# EAGLE board relaycard (EAGLE 6.2)
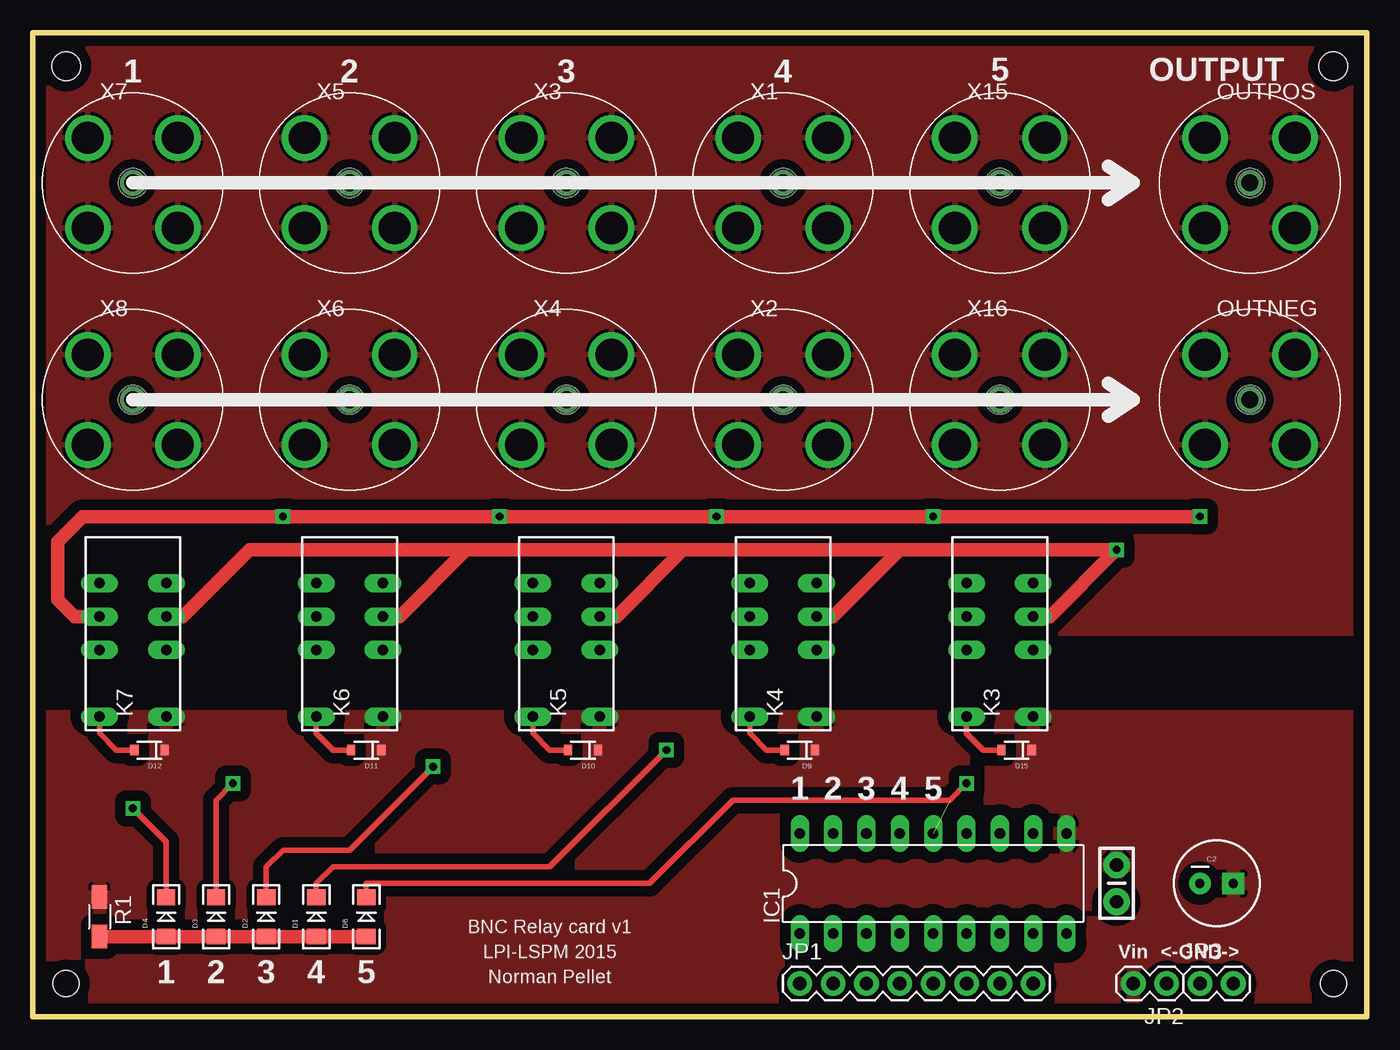
[diagram p0: board, top side]
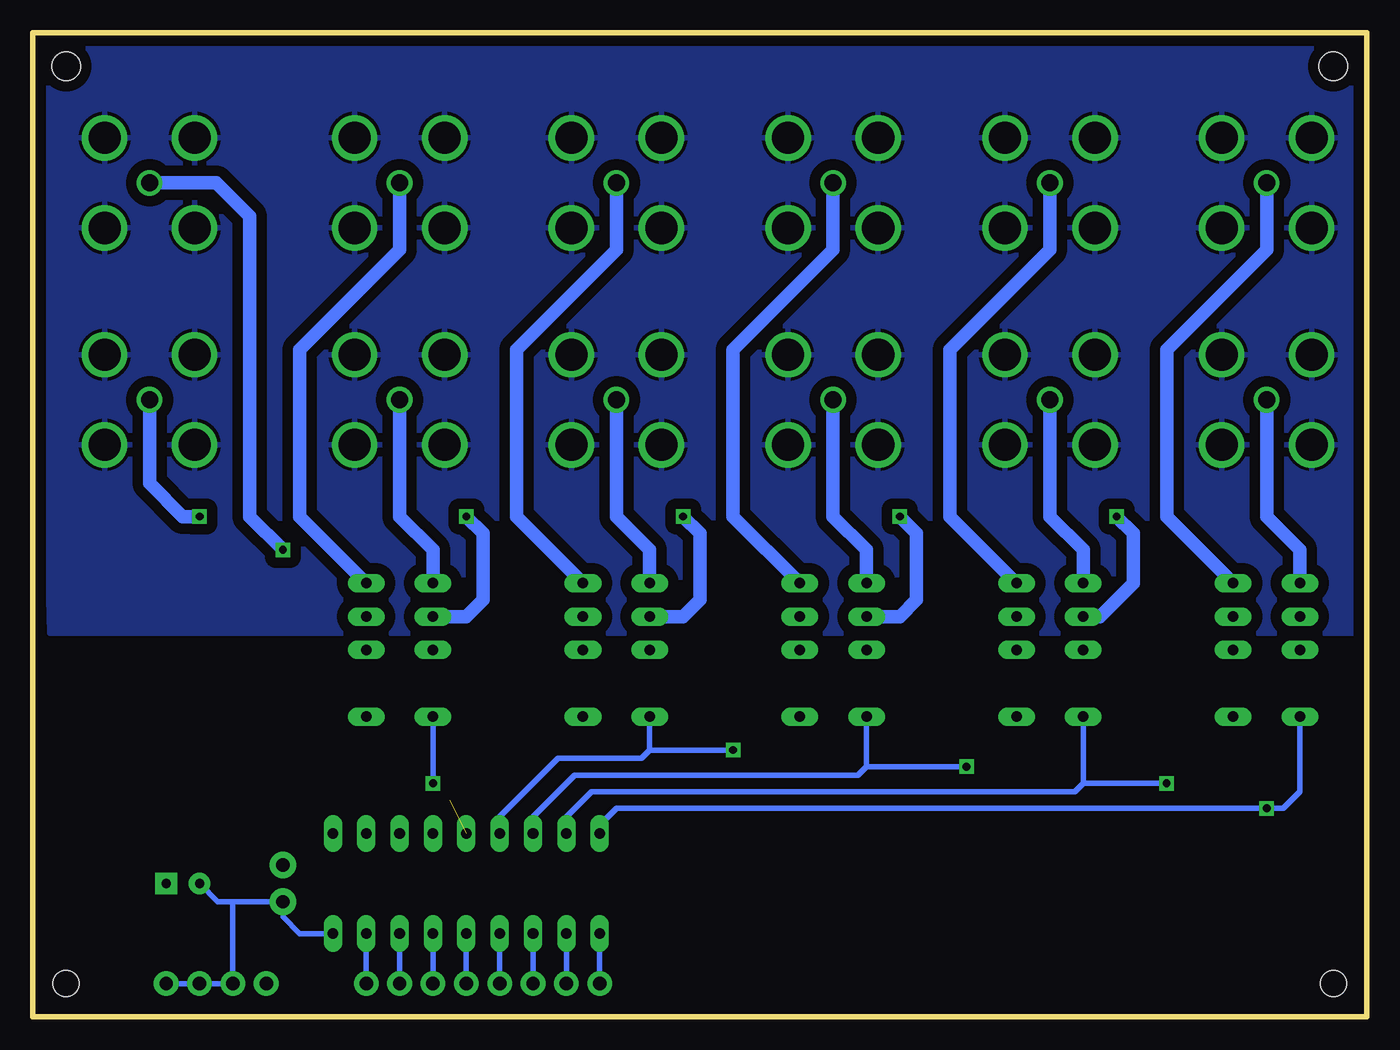
[diagram p1: board, bottom side, seen from below]

Size 101.6 x 74.93 mm. Coordinates in mm from the lower left corner, seen from the top.
Outline: 0,0 101.6,0 101.6,74.93 0,74.93 0,0
Copper layers (1*16): Top 0.035mm / dielectric 1.5mm / Bottom 0.035mm
Design rules: minimum track width 8mil, minimum drill 20mil, track to track 8mil, track to pad 8mil, pad to pad 8mil, via to via 8mil, smd to smd 8mil, copper to edge 10mil, drill to drill 8mil, minimum pad ring 12mil, minimum via ring 10mil, stop-mask expansion 4mil, vias tented up to drill 25mil, thermal gap 10mil
Holes 2.2 mm at 2.54,72.39 99.06,72.39
Holes 2 mm at 99.06,2.54 2.54,2.54

## Footprints (pad centres in the part's own frame; a part is rotated, then mirrored left to right if it is on the bottom)
CAP-PTH-SMALL-KIT = drill 1.016 pad 2.032: 1 -1.397,0; 2 1.397,0
CPOL-RADIAL-100UF-25V = drill 0.7 pad 1.651 square: 1 1.27,0 | drill 0.7 pad 1.651: 2 -1.27,0
LED-1206 = smd 1.2 x 1.4: A -1.5,0; C 1.5,0
SOD-323 = smd 0.63 x 0.83: A 1.15,0; C -1.15,0
DIL18 = drill 0.813 long: 1 -10.16,-3.81; 2 -7.62,-3.81; 3 -5.08,-3.81; 4 -2.54,-3.81; 5 0,-3.81; 6 2.54,-3.81; 7 5.08,-3.81; 8 7.62,-3.81; 9 10.16,-3.81; 10 10.16,3.81; 11 7.62,3.81; 12 5.08,3.81; 13 2.54,3.81; 14 0,3.81; 15 -2.54,3.81; 16 -5.08,3.81; 17 -7.62,3.81; 18 -10.16,3.81
1X08_ROUND = drill 1.016 pad 1.88: 1 0,0; 2 2.54,0; 3 5.08,0; 4 7.62,0; 5 10.16,0; 6 12.7,0; 7 15.24,0; 8 17.78,0
1X02 = drill 1.016 pad 1.88: 1 0,0; 2 2.54,0
NA = drill 0.8 long: 1 -6.35,-2.54; 3 -1.27,-2.54; 4 1.27,-2.54; 5 3.81,-2.54; 8 3.81,2.54; 9 1.27,2.54; 10 -1.27,2.54; 12 -6.35,2.54
112404 = drill 1.3: 1 0,0 | drill 2.44: 2 -3.43,3.43; 3 3.43,3.43; 4 3.43,-3.43; 5 -3.43,-3.43
R1206W = smd 1.8 x 1.2: 1 -1.499,0; 2 1.499,0

## Placement (x,y rotation side)
C1  [CAP-PTH-SMALL-KIT]  82.55,10.16 90 top
C2  [CPOL-RADIAL-100UF-25V]  90.17,10.16 0 top
D1  RED  [LED-1206]  21.59,7.62 90 top
D2  RED  [LED-1206]  17.78,7.62 90 top
D3  RED  [LED-1206]  13.97,7.62 90 top
D4  RED  [LED-1206]  10.16,7.62 90 top
D8  RED  [LED-1206]  25.4,7.62 90 top
D9  250mA/100V  [SOD-323]  58.42,20.32 180 top
D10  250mA/100V  [SOD-323]  41.91,20.32 180 top
D11  250mA/100V  [SOD-323]  25.4,20.32 180 top
D12  250mA/100V  [SOD-323]  8.89,20.32 180 top
D15  250mA/100V  [SOD-323]  74.93,20.32 180 top
IC1  ULN2801A  [DIL18]  68.58,10.16 0 top
JP1  [1X08_ROUND]  58.42,2.54 0 top
JP2  [1X02]  86.36,2.54 180 top
JP3  [1X02]  88.9,2.54 0 top
K3  NA  [NA]  73.66,29.21 90 top
K4  NA  [NA]  57.15,29.21 90 top
K5  NA  [NA]  40.64,29.21 90 top
K6  NA  [NA]  24.13,29.21 90 top
K7  NA  [NA]  7.62,29.21 90 top
OUTNEG  112404  [112404]  92.71,46.99 0 top
OUTPOS  112404  [112404]  92.71,63.5 0 top
R1  [R1206W]  5.08,7.62 270 top
X1  112404  [112404]  57.15,63.5 0 top
X2  112404  [112404]  57.15,46.99 0 top
X3  112404  [112404]  40.64,63.5 0 top
X4  112404  [112404]  40.64,46.99 0 top
X5  112404  [112404]  24.13,63.5 0 top
X6  112404  [112404]  24.13,46.99 0 top
X7  112404  [112404]  7.62,63.5 0 top
X8  112404  [112404]  7.62,46.99 0 top
X15  112404  [112404]  73.66,63.5 0 top
X16  112404  [112404]  73.66,46.99 0 top

## Library data of the parts
C1 = SparkFun-Capacitors; PROD_ID: CAP-08370
C2 = SparkFun-Capacitors; PROD_ID: CAP-08439
D1-D4 D8 = SparkFun-LED; PROD_ID: DIO-09912
D9-D12 D15 = SparkFun-DiscreteSemi; PROD_ID: DIO-09646
IC1 = uln-udn
JP1-JP3 = SparkFun-Connectors
K3-K7 = relay; OC_FARNELL: unknown; OC_NEWARK: unknown
OUTNEG OUTPOS X1-X8 X15 X16 = amphenol-112404_10; MF: Amphenol Connex; MPN: 112404; OC_FARNELL: 1583381; OC_NEWARK: 99H4363
R1 = resistor

## Nets
GND: OUTNEG.2 OUTNEG.3 OUTNEG.4 OUTNEG.5 OUTPOS.2 OUTPOS.3 OUTPOS.4 OUTPOS.5 X1.2 X1.3 X1.4 X1.5 X2.2 X2.3 X2.4 X2.5 X3.2 X3.3 X3.4 X3.5 X4.2 X4.3 X4.4 X4.5 X5.2 X5.3 X5.4 X5.5 X6.2 X6.3 X6.4 X6.5 X7.2 X7.3 X7.4 X7.5 X8.2 X8.3 X8.4 X8.5 X15.2 X15.3 X15.4 X15.5 X16.2 X16.3 X16.4 X16.5
GND2: C1.1 C2.2 IC1.9 JP2.1 JP3.1 JP3.2
N$1: K4.5 X1.1
N$2: IC1.1 JP1.1
N$3: K4.8 X2.1
N$4: K5.5 X3.1
N$5: K5.8 X4.1
N$6: IC1.2 JP1.2
N$7: K6.5 X5.1
N$8: IC1.3 JP1.3
N$9: IC1.4 JP1.4
N$10: IC1.5 JP1.5
N$11: IC1.6 JP1.6
N$12: IC1.7 JP1.7
N$14: K6.8 X6.1
N$18: IC1.8 JP1.8
N$21: K7.5 X7.1
N$23: K7.8 X8.1
N$24: K3.5 X15.1
N$25: K3.8 X16.1
OUTNEG: K3.9 K4.9 K5.9 K6.9 K7.9 OUTNEG.1
OUTPOS: K3.4 K4.4 K5.4 K6.4 K7.4 OUTPOS.1
RELAY1: D4.C D12.A IC1.18 K7.12
RELAY2: D3.C D11.A IC1.17 K6.12
RELAY3: D2.C D10.A IC1.16 K5.12
RELAY4: D1.C D9.A IC1.15 K4.12
RELAY5: D8.C D15.A IC1.14 K3.12
RELAY6: IC1.13
RELAY7: IC1.12
RELAY8: IC1.11
RES: D1.A D2.A D3.A D4.A D8.A R1.2
VCC: C1.2 C2.1 D9.C D10.C D11.C D12.C D15.C IC1.10 JP2.2 K3.1 K4.1 K5.1 K6.1 K7.1 R1.1

## Tracks (layer width: path | path; a pad name or v marks a point on that pad's centre or on a via)
GND
  pour Bottom (isolate 0.813): 0,74.93 0,29.21 100.33,29.21 101.6,74.93
  pour Top (isolate 0.813): 0,74.93 0,29.21 101.6,29.21 101.6,74.93
GND2
  Bottom 0.406: IC1.9 81.28,6.35 82.55,7.62 C1.1 86.36,8.76 | 86.36,8.76 87.5,8.76 C2.2 | 86.36,8.76 JP2.1 JP3.1 JP3.2
N$1
  Bottom 1.016: X1.1 57.15,58.42 64.77,50.8 64.77,38.1 K4.5
N$2
  Bottom 0.406: IC1.1 JP1.1
N$3
  Bottom 1.016: X2.1 57.15,38.1 54.61,35.56 K4.8
N$4
  Bottom 1.016: X3.1 40.64,58.42 48.26,50.8 48.26,38.1 K5.5
N$5
  Bottom 1.016: X4.1 40.64,38.1 38.1,35.56 K5.8
N$6
  Bottom 0.406: JP1.2 IC1.2
N$7
  Bottom 1.016: X5.1 24.13,58.42 31.75,50.8 31.75,38.1 K6.5
N$8
  Bottom 0.406: JP1.3 IC1.3
N$9
  Bottom 0.406: JP1.4 IC1.4
N$10
  Bottom 0.406: JP1.5 IC1.5
N$11
  Bottom 0.406: JP1.6 IC1.6
N$12
  Bottom 0.406: JP1.7 IC1.7
N$14
  Bottom 1.016: X6.1 24.13,38.1 21.59,35.56 K6.8
N$18
  Bottom 0.406: JP1.8 IC1.8
N$21
  Bottom 1.016: X7.1 7.62,58.42 15.24,50.8 15.24,38.1 K7.5
N$23
  Bottom 1.016: X8.1 7.62,38.1 5.08,35.56 K7.8
N$24
  Bottom 1.016: X15.1 73.66,58.42 81.28,50.8 81.28,38.1 K3.5
N$25
  Bottom 1.016: X16.1 73.66,38.1 71.12,35.56 K3.8
OUTNEG  (via drill 0.6)
  Top 1.016: v88.9,38.1 v68.58,38.1 v52.07,38.1 v35.56,38.1 v19.05,38.1 3.81,38.1 1.91,36.2 1.91,31.75 3.17,30.48 K7.9
  Bottom 1.016: v88.9,38.1 90.17,38.1 92.71,40.64 OUTNEG.1 | K6.9 20.32,30.48 17.78,33.02 17.78,36.83 v19.05,38.1 | K5.9 35.56,30.48 34.29,31.75 34.29,36.83 v35.56,38.1 | K4.9 52.07,30.48 50.8,31.75 50.8,36.83 v52.07,38.1 | K3.9 68.58,30.48 67.31,31.75 67.31,36.83 v68.58,38.1
OUTPOS  (via drill 0.6)
  Top 1.016: 33.02,35.56 16.51,35.56 11.43,30.48 K7.4 | 33.02,35.56 49.53,35.56 | 49.53,35.56 66.04,35.56 | 66.04,35.56 v82.55,35.56 77.47,30.48 K3.4 | K4.4 60.96,30.48 66.04,35.56 | K5.4 44.45,30.48 49.53,35.56 | K6.4 27.94,30.48 33.02,35.56
  Bottom 1.016: v82.55,35.56 85.09,38.1 85.09,60.96 87.63,63.5 OUTPOS.1
RELAY1  (via drill 0.6)
  Top 0.406: D12.A 6.35,20.32 5.08,21.59 K7.12 | D4.C 10.16,13.34 v7.62,15.88
  Bottom 0.406: K7.12 5.08,17.14 6.35,15.88 v7.62,15.88 57.15,15.88 58.42,14.61 IC1.18
RELAY2  (via drill 0.6)
  Top 0.406: D11.A 22.86,20.32 21.59,21.59 K6.12 | D3.C 13.97,16.51 v15.24,17.78
  Bottom 0.406: K6.12 21.59,17.78 | 21.59,17.78 22.23,17.14 59.05,17.14 60.96,15.24 IC1.17 | v15.24,17.78 21.59,17.78
RELAY3  (via drill 0.6)
  Top 0.406: D10.A 39.37,20.32 38.1,21.59 K5.12 | D2.C 17.78,11.43 19.05,12.7 24.13,12.7 v30.48,19.05
  Bottom 0.406: K5.12 38.1,19.05 | 38.1,19.05 38.73,18.41 60.33,18.41 63.5,15.24 IC1.16 | v30.48,19.05 38.1,19.05
RELAY4  (via drill 0.6)
  Top 0.406: D9.A 55.88,20.32 54.61,21.59 K4.12 | D1.C 21.59,10.16 22.86,11.43 39.37,11.43 v48.26,20.32
  Bottom 0.406: K4.12 54.61,20.32 | 54.61,20.32 55.24,19.68 61.59,19.68 66.04,15.24 IC1.15 | v48.26,20.32 54.61,20.32
RELAY5  (via drill 0.6)  (1 unrouted)
  Top 0.406: D15.A 72.39,20.32 71.12,21.59 K3.12 | D8.C 25.4,10.16 46.99,10.16 53.34,16.51 69.85,16.51 v71.12,17.78
  Bottom 0.406: v71.12,17.78 K3.12
RES
  Top 1.016: R1.2 D4.A D3.A D2.A D1.A D8.A
VCC
  pour Top (isolate 0.813): 0,22.86 0,0 101.6,0 101.6,22.86

## Text on the board
tPlace: 5 | OUTPUT | 1 | 2 | 3 | 4 | 1 | 2 | 3 | 4 | 5 | BNC Relay card v1 | LPI-LSPM 2015 | Vin | <-GND-> | 1 | 2 | 3 | 4 | 5 | Norman Pellet